# EAGLE board ultraino2 (EAGLE 8.3.2)
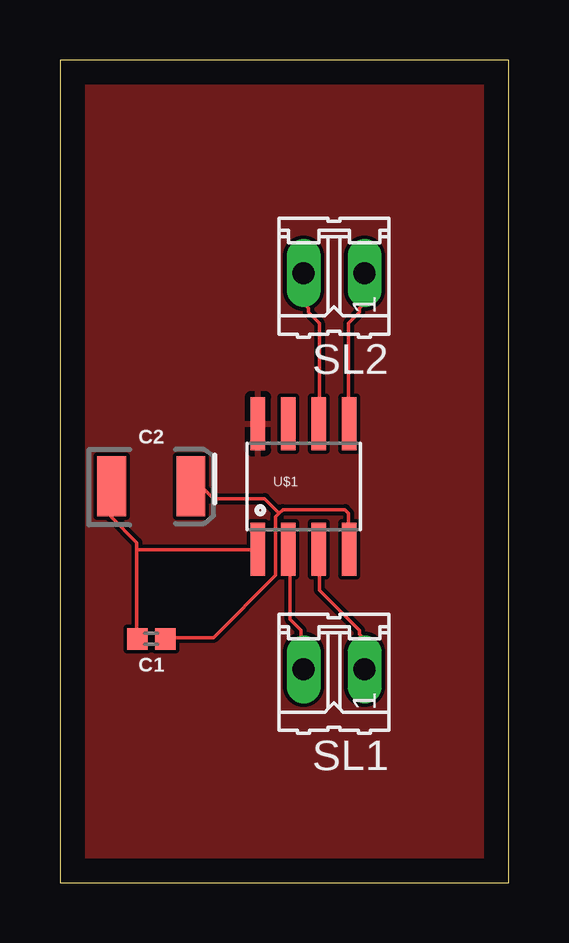
[diagram p0: board, top side]

Size 18.72 x 34.28 mm. Coordinates in mm from the lower left corner, seen from the top.
Outline: 0,0 18.72,0 18.72,34.28 0,34.28 0,0
Copper layers (1*16): Top 0.035mm / dielectric 1.5mm / Bottom 0.035mm
Design rules "default": minimum track width 6mil, minimum drill 0.35mm, track to track 6mil, track to pad 6mil, pad to pad 6mil, via to via 6mil, smd to smd 6mil, copper to edge 40mil, drill to drill 6mil, minimum pad ring 10mil, minimum via ring 8mil, stop-mask expansion 4mil, vias tented up to drill 0mil, thermal gap 10mil

## Footprints (pad centres in the part's own frame; a part is rotated, then mirrored left to right if it is on the bottom)
0402 = smd 0.85 x 0.9: 1 -0.58,0; 2 0.58,0
EIA3528 = smd 1.2 x 2.5: A 1.65,0; C -1.65,0
02P = drill 0.914 long: 1 -1.27,0; 2 1.27,0
SOIC-8 = smd 0.61 x 2.21: 1 -1.905,-2.616; 2 -0.635,-2.616; 3 0.635,-2.616; 4 1.905,-2.616; 5 1.905,2.616; 6 0.635,2.616; 7 -0.635,2.616; 8 -1.905,2.616

## Placement (x,y rotation side)
C1  0.1uF  [0402]  3.81,10.16 180 top
C2  47uF  [EIA3528]  3.81,16.51 0 top
SL1  [02P]  11.43,8.89 180 top
SL2  [02P]  11.43,25.4 180 top
U$1  TC4427  [SOIC-8]  10.16,16.51 0 top

## Library data of the parts
C1 = capacitor; PROD_ID: CAP-12416
C2 = capacitor; PROD_ID: CAP-08310
SL1 SL2 = con-amp-quick; OC_FARNELL: unknown; OC_NEWARK: unknown
U$1 = example

## Nets
GND: U$1.8
N$1: SL1.2 U$1.2
N$2: SL1.1 U$1.3
N$3: SL2.1 U$1.5
N$4: SL2.2 U$1.6
PE: C1.1 C2.A U$1.4
VCC: C1.2 C2.C U$1.1

## Tracks (layer width: path | path; a pad name or v marks a point on that pad's centre or on a via)
GND
  pour Top: 0,35.56 19.05,35.56 20.32,34.29 20.32,0 19.05,-1.27 0,-1.27 -1.27,0 -1.27,34.29
N$1
  Top 0.152: U$1.2 9.6,13.87 9.6,10.97 10.06,10.52 10.06,8.99 SL1.2
N$2
  Top 0.152: U$1.3 10.82,13.87 10.82,12.19 12.5,10.52 12.5,10.36 12.65,10.21 12.65,8.99 SL1.1
N$3
  Top 0.152: U$1.5 12.04,19.2 12.04,23.32 12.5,23.77 12.5,23.93 12.65,24.08 12.65,25.3 SL2.1
N$4
  Top 0.152: U$1.6 10.82,19.2 10.82,23.32 10.36,23.77 10.36,23.93 10.21,24.08 10.21,25.3 SL2.2
PE
  Top 0.152: 9.14,15.39 8.99,15.24 8.99,12.8 6.4,10.21 4.42,10.21 C1.1 | 9.14,15.39 8.53,16 6.4,16 5.94,16.46 5.49,16.46 C2.A | 9.14,15.39 9.3,15.54 11.89,15.54 12.04,15.39 12.04,14.02 U$1.4
VCC
  Top 0.152: 3.2,13.87 3.2,14.17 2.13,15.24 2.13,16.46 C2.C | 3.2,13.87 3.2,10.21 C1.2 | 3.2,13.87 8.23,13.87 U$1.1